# Altium PCB USB2.0_HUB.PcbDoc (part 1 of 2)
Units mm, origin at the board's own origin, x right, y up, seen from the top; angles counter-clockwise.
Board outline 91.95 x 55.97 mm, 4 copper layers (Top Layer, Layer 1, Layer 2, Bottom Layer), stack 1.544 mm thick; 125 components, 88 nets, 457 pads, 299 vias.
Unrouted connection lines stored in the file: 120.
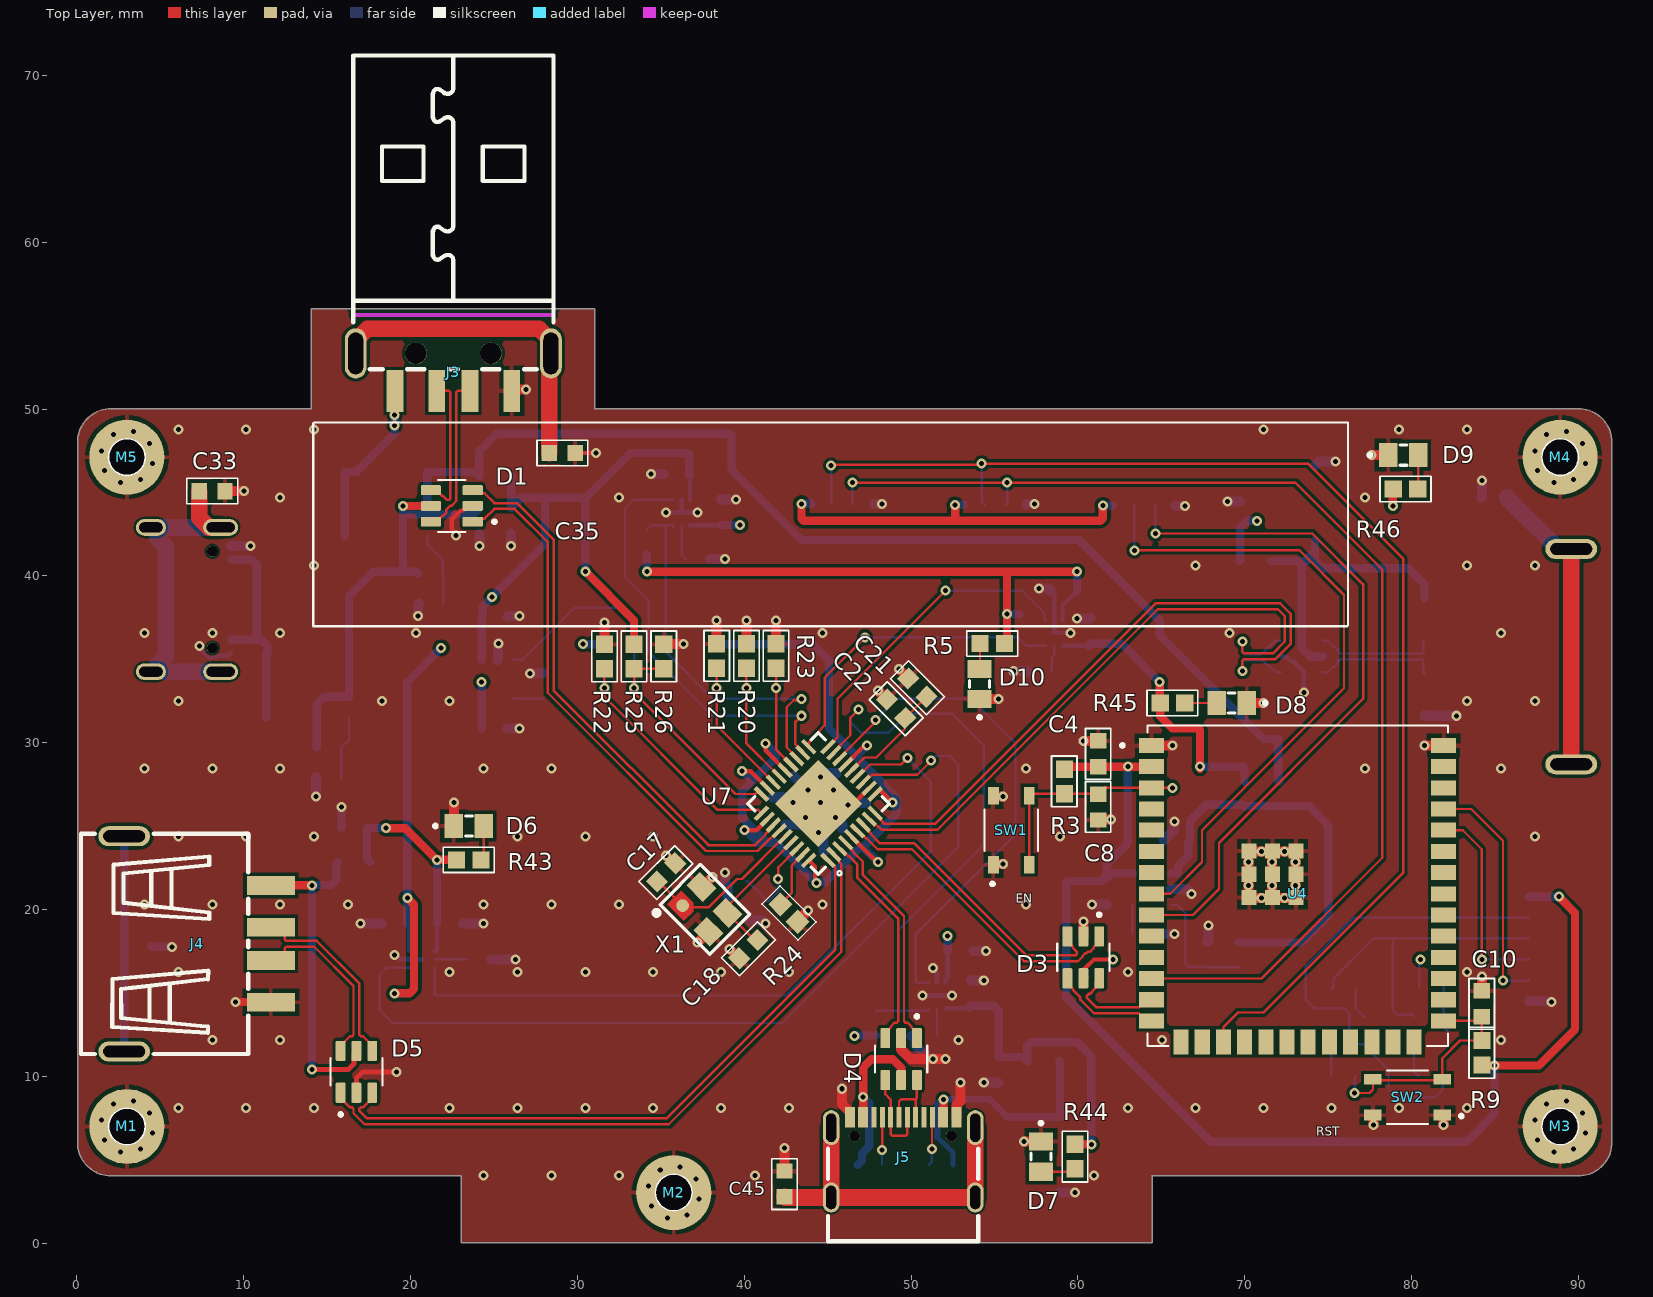
[diagram p0: Top Layer view]
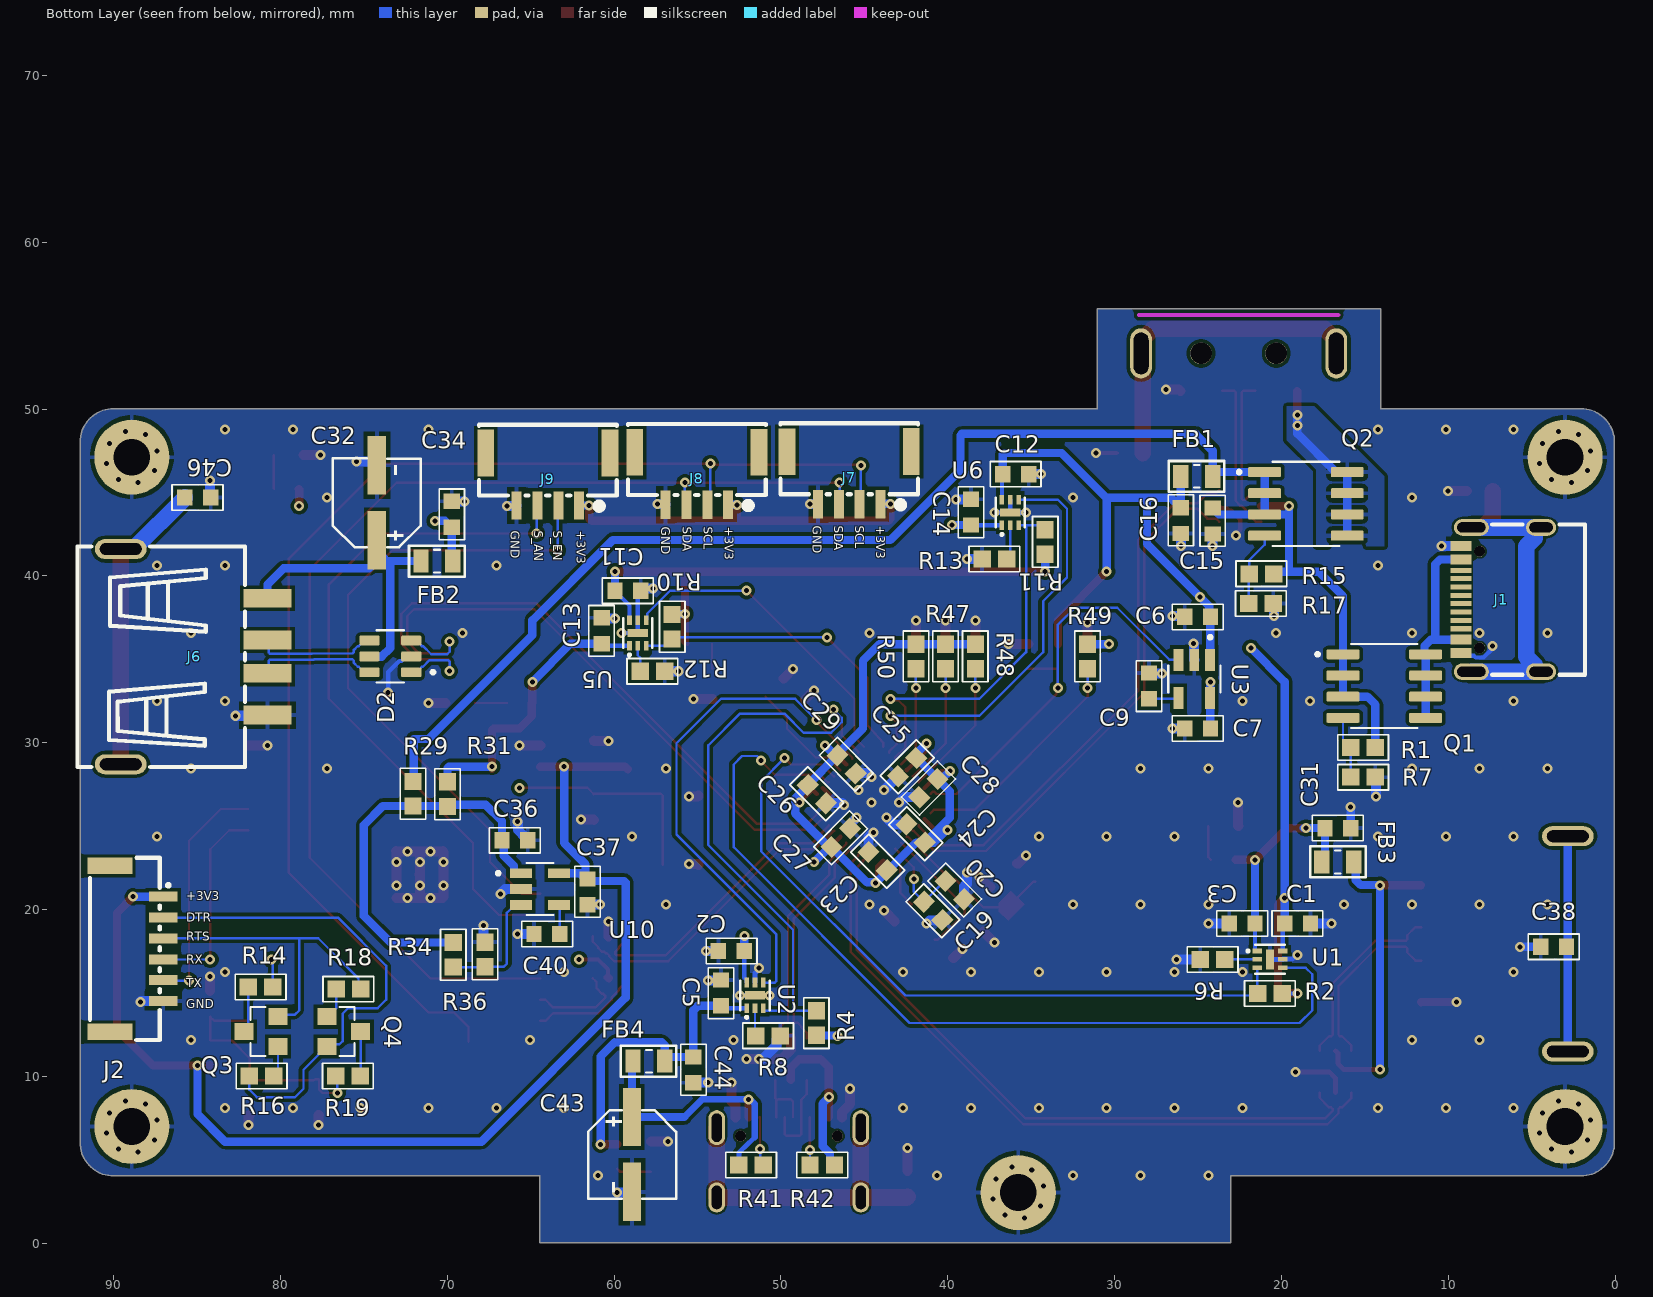
[diagram p1: Bottom Layer view, seen from below]
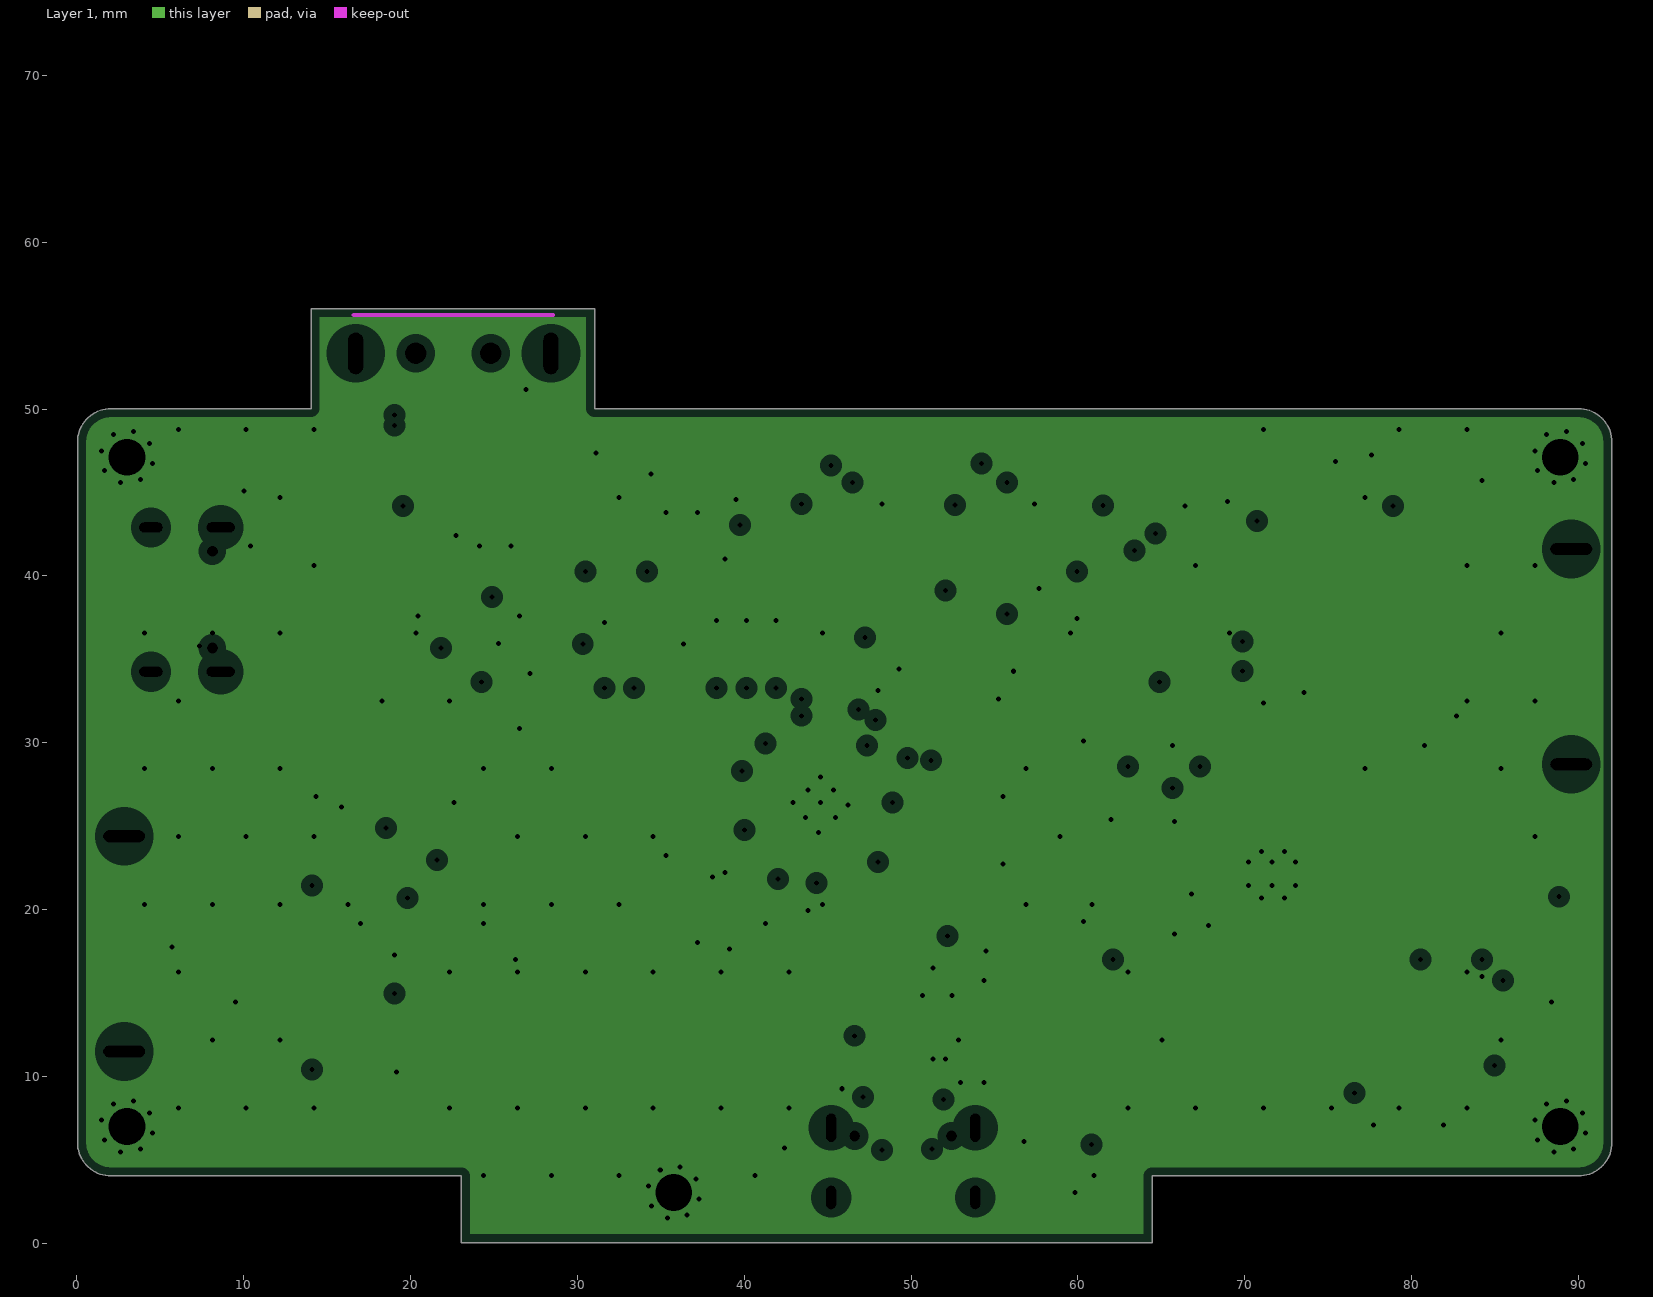
[diagram p2: Layer 1, clearances drawn from the general rule]
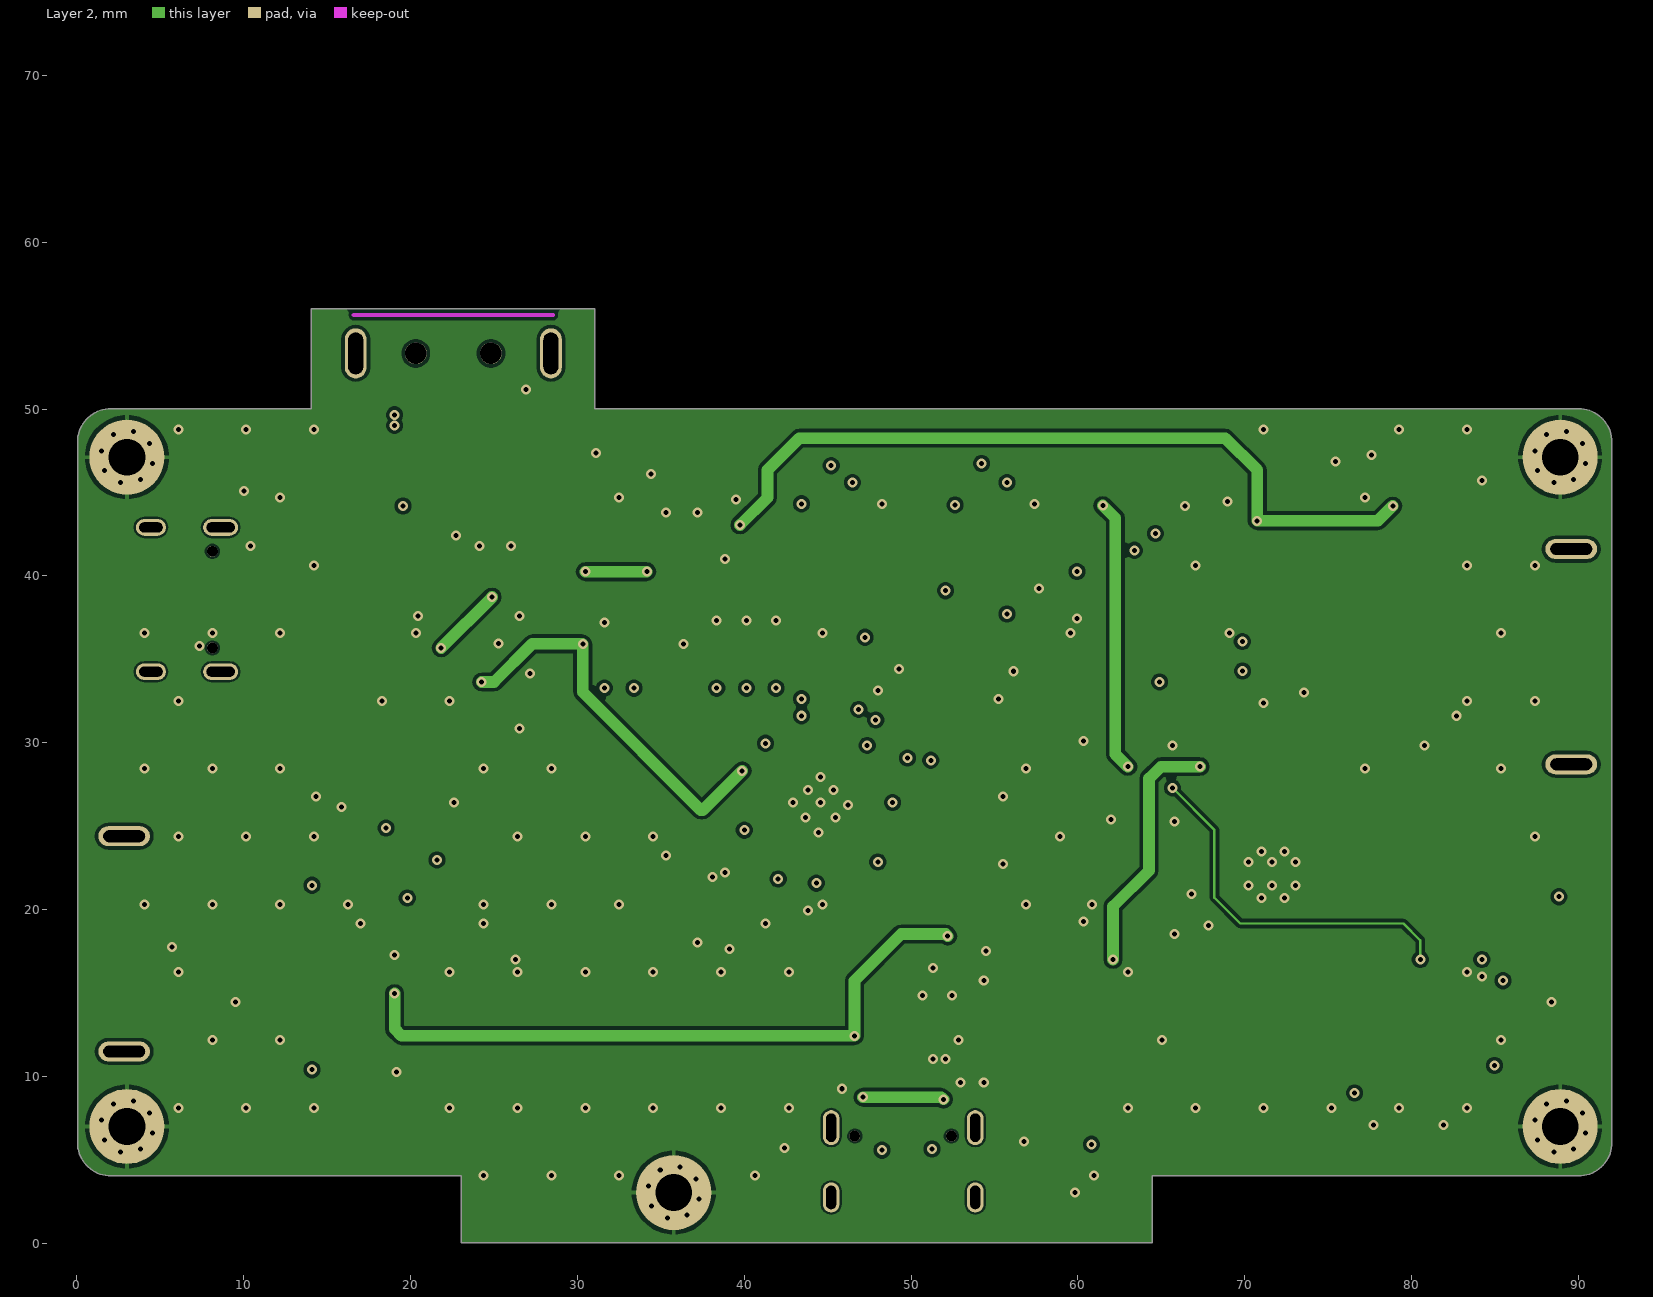
[diagram p3: Layer 2]
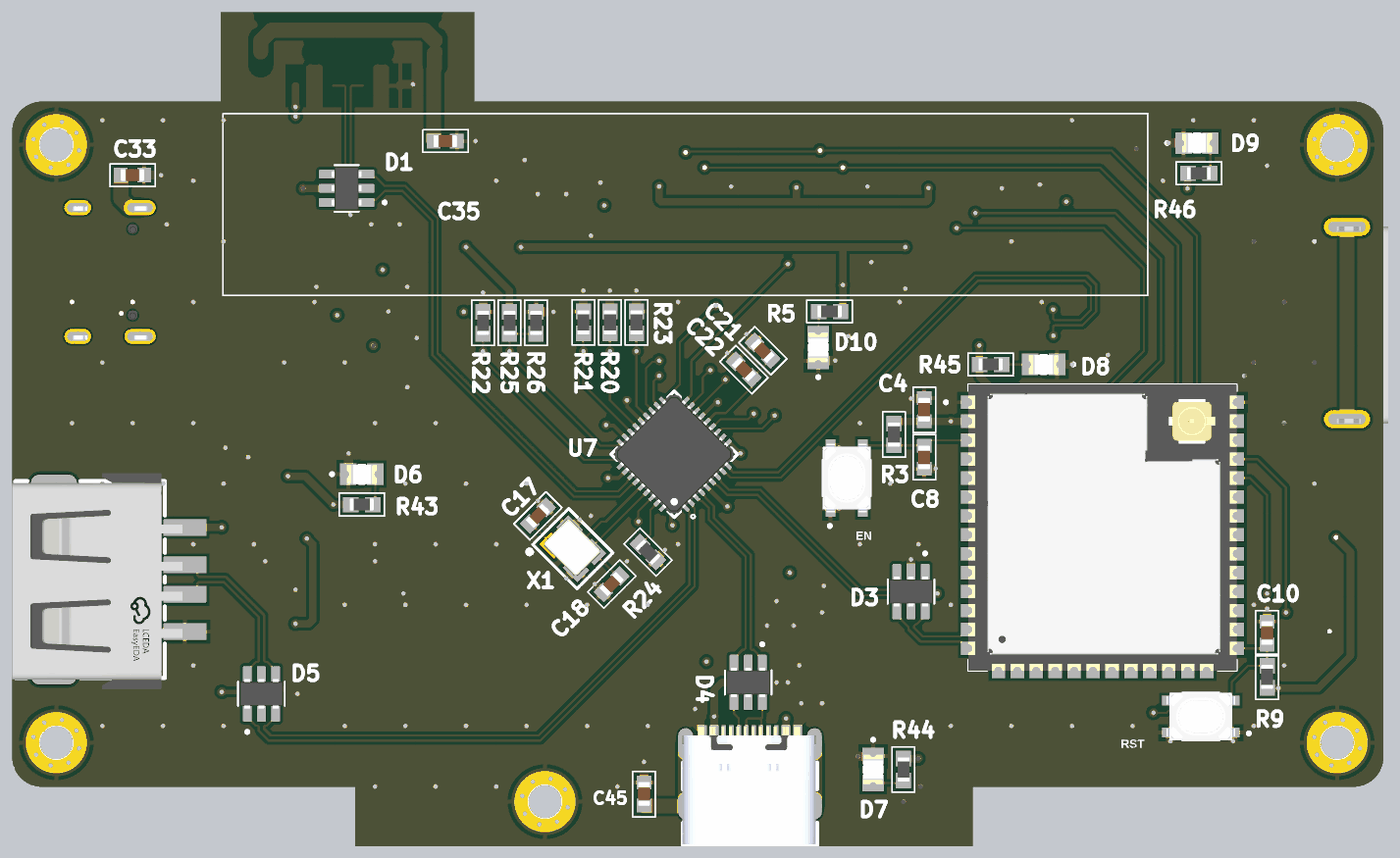
[diagram p5: 3D render of the assembled board from above, using the file's embedded part models]
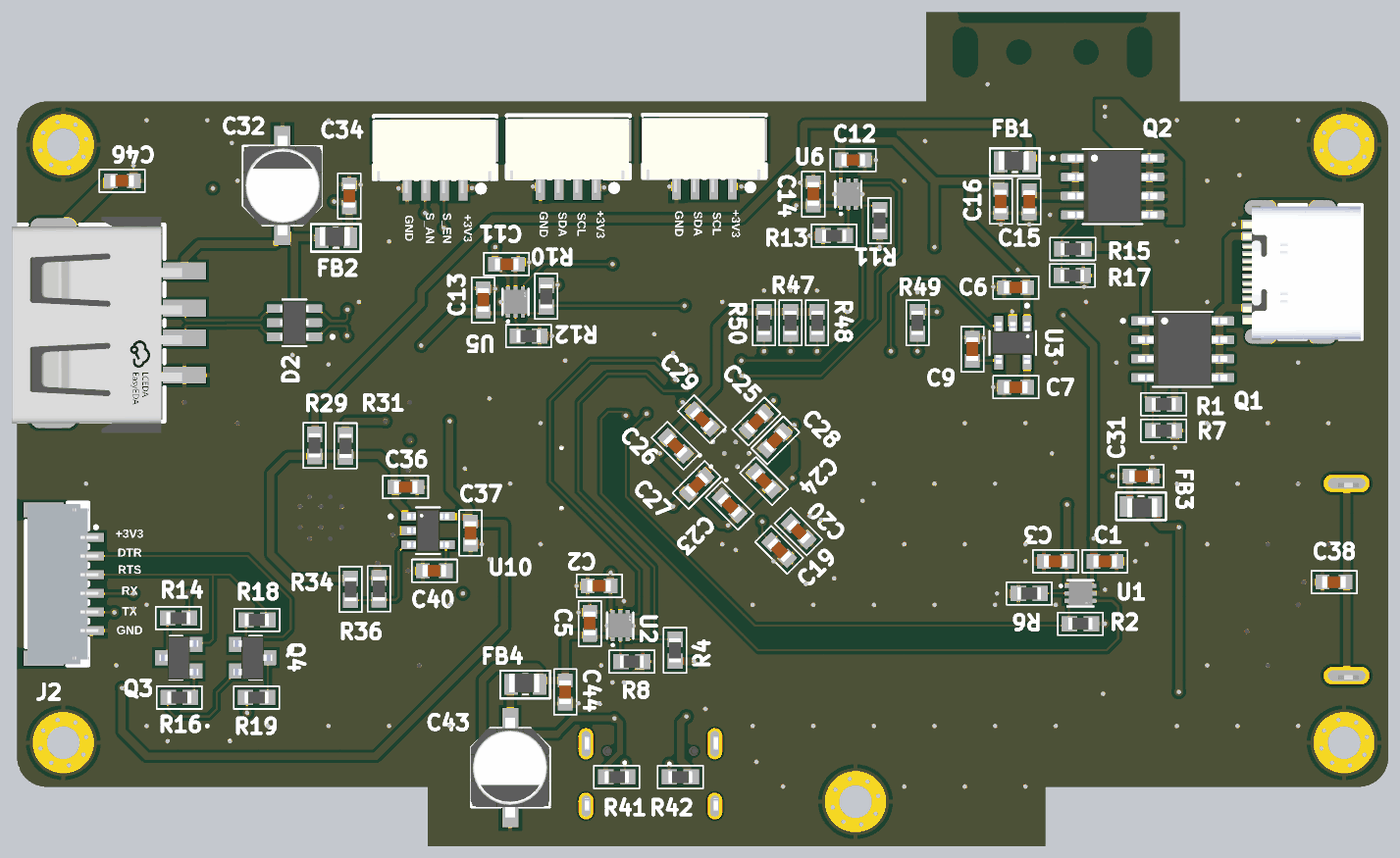
[diagram p6: 3D render of the assembled board from below, using the file's embedded part models]

## Layer stack, top to bottom
Top Solder: solder mask 0.0305, SM-001, Dk 3.8
Top Layer: signal copper 0.035
Dielectric 2: prepreg 0.092, PP-006, Dk 4.1
Layer 1: plane copper 0.03, net GND
Dielectric 1: core 1.23, FR-4, Dk 4.6
Layer 2: signal copper 0.03
Dielectric 3: prepreg 0.092, PP-006, Dk 4.1
Bottom Layer: signal copper 0.035
Board Layer Stack Bottom Solder: solder mask 0.0305, SM-001, Dk 3.8

## Board outline
2.05,4.05 cw(c2.05,6.05) 0.05,6.05 0.05,48.025 cw(c2.05,48.025) 2.05,50.025 14.051,50.025 14.051,56.025 31.038,56.025 31.038,50.025 90,50.025 cw(c90,48.025) 92,48.025 92,6.05 cw(c90,6.05) 90,4.05 64.448,4.05 64.448,0.05 23.05,0.05 23.05,4.05

## Design rules (kind name [scope] priority, off if disabled: settings)
Clearance Clearance_USB_C_Port [InComponent('J1') OR InComponent('J5')] p1: gap=0.12 ignorepadtopadclearanceinfootprint=FALSE
Clearance [All] p2: gap=0.2 ignorepadtopadclearanceinfootprint=FALSE
DiffPairsRouting DiffPairsRouting_90 [All] p1: maxlimit=0.203 minlimit=0.127 mostfreqgap=0.203 toplayer_mingap=0.203 toplayer_minwidth=0.147 toplayer_maxwidth=0.147 toplayer_prefwidth=0.147 bottomlayer_mingap=0.203 bottomlayer_minwidth=0.147 bottomlayer_maxwidth=0.147 bottomlayer_prefwidth=0.147 impedanceprofiledriven=TRUE impedanceprofileid={8A89C3E6-CE10-48AF-BB97-83B28F5E73FC} impedanceprofilevalue=90.000000 maxuncoupledlength=12.7
DiffPairsRouting [All] p2 off: maxlimit=0.254 minlimit=0.254 mostfreqgap=0.254 toplayer_minwidth=0.381 toplayer_maxwidth=0.381 toplayer_prefwidth=0.381 midlayer2_minwidth=0.381 midlayer2_maxwidth=0.381 midlayer2_prefwidth=0.381 bottomlayer_minwidth=0.381 bottomlayer_maxwidth=0.381 bottomlayer_prefwidth=0.381 maxuncoupledlength=12.7
MinimumSolderMaskSliver MinimumSolderMaskSliver_USB2514B [InComponent('U7')] p1: minsoldermaskwidth=0.06
MinimumSolderMaskSliver MinimumSolderMaskSliver_SPX3819M [InComponent('U10') OR InComponent('U9') OR InComponent('U3')] p2: minsoldermaskwidth=0.12
MinimumSolderMaskSliver MinimumSolderMaskSliver_MIC2099 [InComponent('U1') OR InComponent('U2') OR InComponent('U5') OR InComponent('U6')] p3: minsoldermaskwidth=0.08
MinimumSolderMaskSliver MinimumSolderMaskSliver_TypeC_ports [InComponent('J1') OR InComponent('J5')] p4: minsoldermaskwidth=0.08
MinimumSolderMaskSliver [All] p5: minsoldermaskwidth=0.254
PlaneClearance [All] p1: clearance=0.508
PlaneConnect [All] p1: pad.planeconnectstyle=Relief pad.reliefexpansion=0.508 pad.reliefentries=4 pad.reliefconductorwidth=0.508 pad.reliefairgap=0.254 via.planeconnectstyle=Direct via.reliefexpansion=0.508 via.reliefentries=4 via.reliefconductorwidth=0.254 via.reliefairgap=0.254
PolygonConnect [All] p1: connectstyle=Relief reliefconductorwidth=0.254 reliefentries=4 polygonreliefangle="90 Angle" airgapwidth=0.254
RoutingVias [All] p1: holewidth=0.3 width=0.6 viastyle="Through Hole" minholewidth=0.3 minwidth=0.6 maxholewidth=0.3 maxwidth=0.6
SilkToSilkClearance [All] p1: silktosilkclearance=0.2
SilkToSolderMaskClearance [IsText] p1: minsilkscreentomaskgap=0.254 clearancetoexposedcopper=TRUE
SolderMaskExpansion [All] p1: expansion=0.03 istentingtop=FALSE
SupplyNets "Schematic Supply Nets_11" [InNet('SH12_GND')] p1: voltage=0.000
SupplyNets "Schematic Supply Nets_13" [InNet('+5V FILT PORT1')] p2: voltage=0.000
SupplyNets "Schematic Supply Nets_18" [InNet('SH1_GND')] p3: voltage=0.000
SupplyNets "Schematic Supply Nets_17" [InNet('SH3_GND')] p4: voltage=0.000
SupplyNets "Schematic Supply Nets_16" [InNet('SH2_GND')] p5: voltage=0.000
SupplyNets "Schematic Supply Nets_15" [InNet('SH4_GND')] p6: voltage=0.000
SupplyNets "Schematic Supply Nets_7" [InNet('+5V HOST IN')] p7: voltage=0.000
SupplyNets "Schematic Supply Nets_14" [InNet('+5V VBUS_EXT')] p8: voltage=0.000
SupplyNets "Schematic Supply Nets_12" [InNet('+5V FILT PORT4')] p9: voltage=0.000
SupplyNets "Schematic Supply Nets_10" [InNet('+5V FILT PORT2')] p10: voltage=0.000
SupplyNets "Schematic Supply Nets_9" [InNet('+3V3')] p11: voltage=0.000
SupplyNets "Schematic Supply Nets_8" [InNet('+5V PORT3')] p12: voltage=0.000
SupplyNets "Schematic Supply Nets_6" [InNet('+5V HOST')] p13: voltage=0.000
SupplyNets "Schematic Supply Nets_5" [InNet('+5V PORT2')] p14: voltage=0.000
SupplyNets "Schematic Supply Nets_4" [InNet('+5V PORT1')] p15: voltage=0.000
SupplyNets "Schematic Supply Nets_3" [InNet('+5V HOST FILT')] p16: voltage=0.000
SupplyNets "Schematic Supply Nets_2" [InNet('+3V3 ESP1')] p17: voltage=0.000
SupplyNets "Schematic Supply Nets_1" [InNet('GND')] p18: voltage=0.000
SupplyNets "Schematic Supply Nets" [InNet('+5V PORT4')] p19: voltage=0.000
UnRoutedNet [All] p1: checkbadconnections=TRUE
Width Width_Connector_GND [InNet('SH1_GND') OR InNet('SH2_GND') OR InNet('SH3_GND') OR InNet('SH4_GND') OR InNet('SH12_GND')] p1: maxlimit=1 minlimit=0.254 preferedwidth=0.5
Width Width_Power [InNetClass('PWR') OR InNetClass('PWR_3V3')] p2: maxlimit=2 minlimit=0.254 preferedwidth=0.5
Width Width_GND [InNet('GND')] p3: maxlimit=1 minlimit=0.254 preferedwidth=0.6
Width [All] p4: maxlimit=0.143 minlimit=0.143 preferedwidth=0.254 toplayer_maxwidth=0.143 toplayer_prefwidth=0.143 bottomlayer_maxwidth=0.143 bottomlayer_prefwidth=0.143 impedanceprofiledriven=TRUE impedanceprofileid={D57F5E5A-0EFB-4EF6-B3E0-1C0422AFF5EA} impedanceprofilevalue=50.000000 minimp=50.000000 maximp=50.000000 favimp=50.000000
23 further rules are at their usual default settings.

## Classes and differential pairs
net class PWR_3V3: +3V3 "+3V3 ESP1"
net class PWR: "+5V FILT PORT1" "+5V FILT PORT2" "+5V FILT PORT4" "+5V HOST" "+5V HOST FILT" "+5V HOST IN" "+5V PORT1" "+5V PORT2" "+5V PORT3" "+5V PORT4" "+5V VBUS_EXT" VIN_ESP1
net class USB: USB_HOST_A_D_N USB_HOST_A_D_P USB_HOST_D_N USB_HOST_D_P USB_HUB1_D_N USB_HUB1_D_P USB_HUB2_D_N USB_HUB2_D_P USB_HUB3_D_N USB_HUB3_D_P USB_HUB4_D_N USB_HUB4_D_P USB_PORT1_D_N USB_PORT1_D_P USB_PORT2_D_N USB_PORT2_D_P USB_PORT3_D_N USB_PORT3_D_P USB_PORT4_D_N USB_PORT4_D_P
differential pair USB_PORT4_D: +USB_PORT4_D_P -USB_PORT4_D_N
differential pair USB_PORT3_D: +USB_PORT3_D_P -USB_PORT3_D_N
differential pair USB_PORT2_D: +USB_PORT2_D_P -USB_PORT2_D_N
differential pair USB_PORT1_D: +USB_PORT1_D_P -USB_PORT1_D_N
differential pair USB_HOST_D: +USB_HOST_D_P -USB_HOST_D_N
differential pair USB_HOST_A_D: +USB_HOST_A_D_P -USB_HOST_A_D_N
differential pair USB_HUB4_D: +USB_HUB4_D_P -USB_HUB4_D_N
differential pair USB_HUB3_D: +USB_HUB3_D_P -USB_HUB3_D_N
differential pair USB_HUB2_D: +USB_HUB2_D_P -USB_HUB2_D_N
differential pair USB_HUB1_D: +USB_HUB1_D_P -USB_HUB1_D_N

## Components (designator, comment, footprint, x,y, rotation, side; value= is the part's Value field where it differs from the comment)
C1 "2u2" CAP_0603 19.05,19.177 r0 bottom
C2 "2u2" CAP_0603 52.959,17.526 r180 bottom
C3 "2u2" CAP_0603 22.352,19.177 r180 bottom
C4 "100n" CAP_0603 61.214,29.337 r270 top
C5 "2u2" CAP_0603 53.594,14.997 r270 bottom
C6 "2u2" CAP_0603 25.019,37.547 r180 bottom
C7 "2u2" CAP_0603 25.019,30.861 r180 bottom
C8 "100n" CAP_0603 61.214,26.162 r90 top
C9 "100n" CAP_0603 27.94,33.401 r270 bottom
C10 "100n" CAP_0603 84.201,14.351 r270 top
C11 "2u2" CAP_0603 59.182,39.116 r0 bottom
C12 "2u2" CAP_0603 35.941,46.101 r0 bottom
C13 "2u2" CAP_0603 60.747,36.703 r270 bottom
C14 "2u2" CAP_0603 38.608,43.815 r270 bottom
C15 "2u2" CAP_0603 24.13,43.307 r90 bottom
C16 "2u2" CAP_0603 26.035,43.333 r90 bottom
C17 "10p" CAP_0603 35.306,22.225 r225 top
C18 "10p" CAP_0603 40.259,17.653 r45 top
C19 "10n" CAP_0603 40.894,19.939 r45 bottom
C20 "100n" CAP_0603 39.593,21.178 r45 bottom
C21 "10n" CAP_0603 50.388,33.305 r315 top
C22 "100n" CAP_0603 49.118,32.035 r315 top
C23 "2u2" CAP_0603 44.203,22.908 r225 bottom
C24 "100n" CAP_0603 41.917,24.559 r225 bottom
C25 "100n" CAP_0603 42.425,28.561 r135 bottom
C26 "100n" CAP_0603 47.855,26.941 r45 bottom
C27 "100n" CAP_0603 46.427,24.305 r315 bottom
C28 "100n" CAP_0603 41.155,27.291 r135 bottom
C29 "100n" CAP_0603 46.077,28.719 r45 bottom
C31 "2u2" CAP_0603 16.637,24.892 r0 bottom
C32 "100u" CAP_SMD 74.211,44.382 r90 bottom
C33 "4n7" CAP_0603 8.128,45.085 r0 top
C34 "2u2" CAP_0603 69.723,43.688 r270 bottom
C35 "4n7" CAP_0603 29.109,47.371 r0 top
C36 "2u2" CAP_0603 65.954,24.156 r0 bottom
C37 "2u2" CAP_0603 61.595,21.082 r90 bottom
C38 "4n7" CAP_0603 3.683,17.78 r180 bottom
C40 "100n" CAP_0603 64.008,18.542 r180 bottom
C43 "100u" CAP_SMD 58.928,5.334 r270 bottom locked
C44 "2u2" CAP_0603 55.245,10.414 r90 bottom
C45 "4n7" CAP_0603 42.418,3.556 r270 top
C46 "4n7" CAP_0603 84.963,44.704 r0 bottom
D1 "USBLC6-2SC6" USBLC6-2SC6_SOT-23-6L 22.479,44.323 r180 top
D2 "USBLC6-2SC6" USBLC6-2SC6_SOT-23-6L 73.406,35.306 r0 bottom
D3 "USBLC6-2SC6" USBLC6-2SC6_SOT-23-6L 60.198,17.145 r270 top
D4 "USBLC6-2SC6" USBLC6-2SC6_SOT-23-6L 49.276,11.049 r270 top
D5 "USBLC6-2SC6" USBLC6-2SC6_SOT-23-6L 16.891,10.287 r90 top
D6 "LED_GREEN" LED_0805 23.495,25.019 r0 top
D7 "LED_GREEN" LED_0805 57.785,5.207 r270 top
D8 "LED_GREEN" LED_0805 69.215,32.385 r180 top
D9 "LED_GREEN" LED_0805 79.502,47.244 r0 top
D10 "LED_RED" LED_0805 54.102,33.528 r90 top
FB1 "120Ω@100MHz" FB_0805 25.085,45.974 r0 bottom
FB2 "120Ω@100MHz" FB_0805 70.612,40.894 r0 bottom
FB3 "120Ω@100MHz" FB_0805 16.637,22.86 r180 bottom
FB4 "120Ω@100MHz" FB_0805 57.912,10.922 r0 bottom
J1 "USB 2.0 Type-C 16POS SMD R/A" GT-USB-7010B 4.358,38.421 r90 bottom
J2 "CONN 6P" JST_6P_GH_W/A 89.027,17.78 r270 bottom
J3 "USB 2.0 Type-A M R/A" "MALE USB 2.0 TYPE-A 4POS SMD R/A" 22.558,64.075 r180 top locked
J4 "USB 2.0 Type-A FM R/A" "Femalem USB 2.0 Type-A 4POS SMD R/A" 5.08,17.907 r270 top
J5 "USB 2.0 Type-C 16POS SMD R/A" GT-USB-7010B 49.362,2.667 r0 top locked
J6 "USB 2.0 Type-A FM R/A" "FEMALEM USB 2.0 TYPE-A 4POS SMD R/A" 87.326,35.116 r270 bottom locked
J7 "CONN 4P" JST_4P_GH_R/A 46.101,46.482 r0 bottom
J8 "CONN 4P" JST_4P_GH_R/A 55.23,46.439 r0 bottom
J9 "CONN 4P" JST_4P_GH_R/A 64.159,46.401 r0 bottom
M1 "MH" M2_MOUNTING_HOLE 3.01,7.01 r0 top locked
M2 "MH" M2_MOUNTING_HOLE 35.778,3.052 r0 top locked
M3 "MH" M2_MOUNTING_HOLE 88.9,7.01 r0 top locked
M4 "MH" M2_MOUNTING_HOLE 88.9,47.121 r0 top locked
M5 "MH" M2_MOUNTING_HOLE 3.01,47.121 r0 top locked
Q1 "AO4407A" AO4407A_SOIC-8 13.97,33.401 r180 bottom
Q2 "AO4407A" AO4407A_SOIC-8 18.669,44.323 r180 bottom locked
Q3 "S8050" S8050_SOT-23 81.155,12.7 r90 bottom
Q4 "S8050" S8050_SOT-23 76.198,12.7 r270 bottom
R1 "12k" RES_0603 15.113,29.718 r180 bottom
R2 "12k" RES_0603 20.701,14.986 r180 bottom
R3 "10k" RES_0603 59.182,27.686 r90 top
R4 "12k" RES_0603 47.879,13.208 r270 bottom
R5 "1k" RES_0603 54.864,35.941 r0 top
R6 "330R" RES_0603 24.13,17.018 r180 bottom
R7 "12k" RES_0603 15.113,27.94 r0 bottom
R8 "330R" RES_0603 50.773,12.446 r0 bottom
R9 "10k" RES_0603 84.201,11.43 r270 top
R10 "12k" RES_0603 56.515,36.957 r90 bottom
R11 "12k" RES_0603 34.163,42.037 r270 bottom
R12 "330R" RES_0603 57.699,34.29 r0 bottom
R13 "330R" RES_0603 37.211,41.021 r180 bottom
R14 "0" RES_0603 81.18,15.367 r180 bottom
R15 "12k" RES_0603 21.209,40.132 r180 bottom
R16 "10k" RES_0603 81.126,10.033 r0 bottom
R17 "12k" RES_0603 21.236,38.354 r0 bottom
R18 "10k" RES_0603 75.919,15.24 r180 bottom
R19 "0" RES_0603 75.946,10.033 r0 bottom
R20 "100k" RES_0603 40.132,35.206 r270 top
R21 "100k" RES_0603 38.354,35.206 r270 top
R22 "100k" RES_0603 31.623,35.179 r270 top
R23 "100k" RES_0603 41.91,35.206 r270 top
R24 "12k" RES_0603 42.684,19.8 r315 top
R25 "100k" RES_0603 33.401,35.179 r90 top
R26 "100k" RES_0603 35.179,35.179 r270 top
R29 "0" RES_0603 72.05,26.95 r90 bottom
R31 "0" RES_0603 69.977,26.924 r270 bottom
R34 "100k" RES_0603 69.637,17.298 r90 bottom
R36 "100k" RES_0603 67.732,17.325 r270 bottom
R41 "56k" RES_0603 51.789,4.699 r0 bottom
R42 "56k" RES_0603 47.525,4.699 r180 bottom
R43 "4k7" RES_0603 23.495,22.987 r180 top
R44 "4k7" RES_0603 59.817,5.207 r90 top
R45 "4k7" RES_0603 65.659,32.385 r180 top
R46 "4k7" RES_0603 79.629,45.212 r180 top
R47 "100k" RES_0603 40.132,35.179 r90 bottom
R48 "100k" RES_0603 38.354,35.179 r90 bottom
R49 "100k" RES_0603 31.623,35.179 r90 bottom
R50 "100k" RES_0603 41.91,35.179 r90 bottom
SW1 "PB" "ALPSALPINE SKRPABE010" 56.007,24.765 r90 top
SW2 "PB" "ALPSALPINE SKRPABE010" 79.756,8.763 r180 top
U1 "MIC2099-1YMT-TR" MIC2099_UDFN-6 20.684,16.962 r270 bottom
U2 "MIC2099-1YMT-TR" MIC2099_UDFN-6 51.49,14.876 r180 bottom
U3 "SPX3819M5-L-3-3/TR" SPX3819M5-L-3-3/TR_SOT-23-5 25.23,33.705 r270 bottom
U4 "SWITCH TACTILE SPST SMD" XCVR_ESP32-S3-WROOM-1U 73.165,21.435 r0 top locked
U5 "MIC2099-1YMT-TR" MIC2099_UDFN-6 58.516,36.593 r180 bottom
U6 "MIC2099-1YMT-TR" MIC2099_UDFN-6 36.195,43.815 r180 bottom
U7 "USB2514B-AEZC-TR" USB2514B_VQFN-36-EP(6x6) 43.547,27.258 r135 top locked
U10 "SPX3819M5-L-3-3/TR" SPX3819M5-L-3-3/TR_SOT-23-5 64.318,21.235 r180 bottom
X1 "24Mhz" SMD3225-4P 37.602,20.101 r135 top

## Footprints (in the part's own frame and the unit in brackets; to place one, negate y for a bottom-side part, rotate by r counter-clockwise, add the part's x,y. Pads: shape width x height; smd on the part's side, far side on the other; paste and mask are expansions set on the pad)
"ALPSALPINE SKRPABE010" [mm]
  rect 1.05x0.65 smd: 1(-2.075,1.075) 2(2.075,1.075) 3(-2.075,-1.075) 4(2.075,-1.075)
  silkscreen extent -3.32,-1.6 1.23,1.6, body extent -2.3,-1.6 2.3,1.6, height 2.5
AO4407A_SOIC-8 [mm]
  rrect25% 1.97x0.6 smd: 1(-2.348,1.905) 2(-2.348,0.635) 3(-2.348,-0.635) 4(-2.348,-1.905) 5(2.602,-1.905) 6(2.602,-0.635) 7(2.602,0.635) 8(2.602,1.905)
  silkscreen extent -3.97,-2.52 2.13,2.52, body extent -2.87,-2.45 3.13,2.45, height 1.75
CAP_0603 [mm]
  rect 0.92x0.98 smd: 1(-0.788,0) 2(0.762,0)
  silkscreen extent -1.52,-0.76 1.52,0.76, body extent -0.81,-0.41 0.79,0.41, height 0.9
CAP_SMD [mm]
  rect 3.5x1.1 smd paste+0 mask+0.051: 1(-2.245,0) 2(2.245,0)
  silkscreen extent -2.66,-2.62 2.66,2.65, body extent -3.34,-2.67 3.34,2.63, height 5.9
FB_0805 [mm]
  rect 0.92x1.38 smd: 1(-0.955,0) 2(0.955,0)
  silkscreen extent -1.65,-0.91 1.68,0.94, body extent -0.92,-0.71 1.08,0.54, height 0.6
"Femalem USB 2.0 Type-A 4POS SMD R/A" [mm] "Female"
  rect 1.12x2.88 smd paste-100 mask+0.051: 1(-3.547,6.554) 2(-1.047,6.554) 3(0.953,6.554) 4(3.453,6.554)
  oval 1.2x3.1 hole 0.7 slot 2.5 at 90 deg paste-2539.97 mask+0.051: 5(-6.497,-2.236) 6(6.403,-2.236)
  silkscreen extent -6.65,-4.83 6.56,5.21, body extent -7.18,-5.01 7.32,6.39, height 6.68
"FEMALEM USB 2.0 TYPE-A 4POS SMD R/A" [mm] "Female"
  rect 1.12x2.88 smd paste-100 mask+0.051: 1(-3.547,6.554) 2(-1.047,6.554) 3(0.953,6.554) 4(3.453,6.554)
  oval 1.2x3.1 hole 0.7 slot 2.5 at 90 deg paste-2539.97 mask+0.051: 5(-6.497,-2.236) 6(6.403,-2.236)
  silkscreen extent -6.65,-4.83 6.56,5.21, body extent -7.18,-5.01 7.32,6.39, height 6.68
GT-USB-7010B [mm]
  rect 0.6x1.24 smd paste-100 mask+0.05: A1_B12(-3.034,4.89) A4_B9(-2.234,4.89) B1_A12(3.366,4.89) B4_A9(2.566,4.89)
  rect 0.3x1.24 smd paste-100 mask+0.05: A5(-1.084,4.89) A6(-0.084,4.89) A7(0.416,4.89) A8(1.416,4.89) B5(1.916,4.89) B6(0.916,4.89) B7(-0.584,4.89) B8(-1.584,4.89)
  oval 1x2.1 hole 0.6 slot 1.7 at 90 deg paste-2539.97 mask+0.05: SH1(-4.154,4.27) SH2(4.486,4.27)
  oval 1x1.8 hole 0.6 slot 1.4 at 90 deg paste-2539.97 mask+0.05: SH3(-4.154,0.09) SH4(4.486,0.09)
  round 0.65 hole 0.65 unplated paste-2539.97: ""(-2.734,3.77) ""(3.056,3.77)
  silkscreen extent -4.33,-2.54 4.67,3.01, body extent -4.37,-2.47 4.57,5.43, height 3.31
JST_4P_GH_R/A [mm]
  rect 0.6x1.7 smd paste+0 mask+0.05: 1(-2.068,2.18) 2(-0.818,2.18) 3(0.432,2.18) 4(1.682,2.18)
  rect 1x2.8 smd paste+0 mask+0.05: 5(3.532,-0.97) 6(-3.918,-0.97)
  silkscreen extent -4.32,-2.67 3.93,2.42, body extent -4.25,-2.41 4,2.59, height 4.38
JST_6P_GH_W/A [mm]
  rect 0.6x1.7 smd paste+0 mask+0.051: 1(-2.998,2.01) 2(-1.748,2.01) 3(-0.498,2.01) 4(0.752,2.01) 5(2.002,2.01) 6(3.252,2.01)
  rect 1x2.7 smd paste+0 mask+0.051: 7(-4.848,-1.19) 8(5.102,-1.19)
  silkscreen extent -5.33,-2.38 5.59,2.41, body extent -5.25,-2.29 5.5,2.51, height 4.38
LED_0805 [mm]
  rect 1.1x1.45 smd: A(0.9,0) C(-0.9,0)
  silkscreen extent -2.1,-0.6 0.2,0.6, body extent -1,-0.65 1,0.65, height 0.9
M2_MOUNTING_HOLE [mm]
  round 4.5 hole 2.2 mask-0.2: 1(0,0)
"MALE USB 2.0 TYPE-A 4POS SMD R/A" [mm]
  rect 1x2.5 smd paste-100 mask+0.051: 1(3.488,12.985) 2(0.988,12.985) 3(-1.012,12.985) 4(-3.512,12.985)
  oval 1.3x3 hole 0.9 slot 2.5 at 90 deg paste-2539.97 mask+0.051: 5(-5.862,10.735) 5(5.838,10.735)
  round 1.3 hole 1.3 unplated paste-2539.97: ""(-2.262,10.735) ""(2.238,10.735)
  Keep-Out Layer lines w0.254: 5.957,8.435 -5.981,8.435
  silkscreen extent -6.01,-7.11 5.99,11.69, body extent -6.22,-6.96 6.3,13.84, height 3.38
MIC2099_UDFN-6 [mm]
  rect 0.28x0.585 smd paste+0 mask+0.051: 1(-0.564,-0.779) 2(-0.064,-0.779) 3(0.436,-0.779) 4(0.436,0.756) 5(-0.064,0.756) 6(-0.564,0.756)
  rect 1.2x0.5 smd paste+0 mask+0.051: 7(-0.064,-0.012)
  silkscreen extent -0.94,-1.4 0.81,0.86, body extent -0.86,-0.8 0.74,0.8, height 0.58
RES_0603 [mm]
  rect 1.04x1.02 smd: 1(-0.735,0) 2(0.735,0)
  silkscreen extent -1.52,-0.76 1.52,0.76, body extent -0.8,-0.4 0.8,0.4, height 0.55
S8050_SOT-23 [mil]
  rect 40x45 smd: 1(-35,-40) 2(35,-40) 3(0,40)
  silkscreen extent -58,-10 58,25, body extent -57,-51 57,51, height 55
SMD3225-4P [mm] "HCI XC32M4-8.000-F12LJDT"
  round 0.762 smd: 1(1.016,0.813)
  rect 1.4x1.15 smd paste+0 mask+0.051: 2(-1.185,0.824) 3(-1.185,-0.776) 4(1.016,-0.776)
  Top Layer region: 1.716,0.249 0.678,0.249 0.316,0.628 0.316,1.399 1.716,1.399
  silkscreen extent -2.18,-1.68 2.02,2.37, body extent -1.6,-1.25 1.6,1.25, height 0.6
SPX3819M5-L-3-3/TR_SOT-23-5 [mm]
  rect 1.32x0.59 smd paste+0 mask+0.102: 1(-1.272,0.95) 2(-1.272,0) 3(-1.272,-0.95) 4(1.018,-0.95) 5(1.018,0.95)
  silkscreen extent -2.73,-1.56 0.67,1.56, body extent -1.53,-1.45 1.27,1.45, height 1.45
USB2514B_VQFN-36-EP(6x6) [mm]
  rect 1.08x0.26 smd: 1(-4.085,2) 2(-4.085,1.5) 3(-4.085,1) 4(-4.085,0.5) 5(-4.085,0) 6(-4.085,-0.5) 7(-4.085,-1) 8(-4.085,-1.5) 9(-4.085,-2) 19(1.545,-2) 20(1.545,-1.5) 21(1.545,-1) 22(1.545,-0.5) 23(1.545,0) 24(1.545,0.5) 25(1.545,1) 26(1.545,1.5) 27(1.545,2)
  rect 0.26x1.08 smd: 10(-3.27,-2.815) 11(-2.77,-2.815) 12(-2.27,-2.815) 13(-1.77,-2.815) 14(-1.27,-2.815) 15(-0.77,-2.815) 16(-0.27,-2.815) 17(0.23,-2.815) 18(0.73,-2.815) 28(0.73,2.815) 29(0.23,2.815) 30(-0.27,2.815) 31(-0.77,2.815) 32(-1.27,2.815) 33(-1.77,2.815) 34(-2.27,2.815) 35(-2.77,2.815) 36(-3.27,2.815)
  rect 3.7x3.7 smd paste-0.679: 37(-1.27,0)
  silkscreen extent -5.24,-3 1.73,3, body extent -4.27,-3 1.73,3, height 1
USBLC6-2SC6_SOT-23-6L [mm]
  rrect25% 1.21x0.59 smd: 1(-1.255,1.077) 2(-1.255,0.127) 3(-1.255,-0.823) 4(1.255,-0.823) 5(1.255,0.127) 6(1.255,1.077)
  silkscreen extent -2.66,-1.44 0.81,1.69, body extent -1.4,-1.34 1.4,1.59, height 0.4
XCVR_ESP32-S3-WROOM-1U [mm]
  rect 1.5x0.9 smd: 1(-8.75,8.41) 2(-8.75,7.14) 3(-8.75,5.87) 4(-8.75,4.6) 5(-8.75,3.33) 6(-8.75,2.06) 7(-8.75,0.79) 8(-8.75,-0.48) 9(-8.75,-1.75) 10(-8.75,-3.02) 11(-8.75,-4.29) 12(-8.75,-5.56) 13(-8.75,-6.83) 14(-8.75,-8.1) 27(8.75,-8.1) 28(8.75,-6.83) 29(8.75,-5.56) 30(8.75,-4.29) 31(8.75,-3.02) 32(8.75,-1.75) 33(8.75,-0.48) 34(8.75,0.79) 35(8.75,2.06) 36(8.75,3.33) 37(8.75,4.6) 38(8.75,5.87) 39(8.75,7.14) 40(8.75,8.41)
  rect 0.9x1.5 smd: 15(-6.985,-9.35) 16(-5.715,-9.35) 17(-4.445,-9.35) 18(-3.175,-9.35) 19(-1.905,-9.35) 20(-0.635,-9.35) 21(0.635,-9.35) 22(1.905,-9.35) 23(3.175,-9.35) 24(4.445,-9.35) 25(5.715,-9.35) 26(6.985,-9.35)
  rect 0.9x0.9 smd: 41_1(-2.9,2.09) 41_2(-1.5,2.09) 41_3(-0.1,2.09) 41_4(-2.9,0.69) 41_5(-1.5,0.69) 41_6(-0.1,0.69) 41_7(-2.9,-0.71) 41_8(-1.5,-0.71) 41_9(-0.1,-0.71)
  silkscreen extent -10.6,-9.6 9,9.6, body extent -9,-9.6 9,9.6, height 3.35

## Part data
C1 C2 C3 C5 C11 C12 C13 C14 C15 C16 C23 C31 C34 C44: library part "YAGEO CC0603KRX7R9BB104_1", "CAP CER 2.2uF 16V X7R 0603", LCSC Part Number=C914769, Manufacturer=YAGEO, Manufacturer Part Number=CC0603KRX7R7BB225, Package=0603, ComponentLink2Description="Digikey Link", ComponentLink3Description="LCSC Link", ComponentLink3URL=https://www.lcsc.com/product-detail/C914769.html?spm=wm.fly.bg.0.xh___wm.sxq.dhl.mly.12-0-4&lcsc_vid=QlAIX1RQQQJfX1VRTwcNAQJXTlRaUQBVEQBYAwJfFFcxVlNRQ1VcX1FSRFRbUDsOAxUeFF5JWBYZEEoKFBINSQcJGk4dAgUUFAk%3D, Mounting Type=SMD
C4 C8 C9 C10 C20 C22 C24 C25 C26 C27 C28 C29 C40: library part "YAGEO CC0603KRX7R9BB104", "100nF ±10% 50V Ceramic Capacitor X7R 0603", LCSC Part Number=C14663, Manufacturer=YAGEO, Manufacturer Part Number=CC0603KRX7R9BB104, Package=0603, ComponentLink2Description="Digikey Link", ComponentLink3Description="LCSC Link", ComponentLink3URL=https://www.lcsc.com/product-detail/C14663.html?spm=wm.fly.bg.0.xh___wm.sxq.dhl.mly.12-0-4&lcsc_vid=QlAIX1RQQQJfX1VRTwcNAQJXTlRaUQBVEQBYAwJfFFcxVlNRQ1VcX1FSRFRbUDsOAxUeFF5JWBYZEEoKFBINSQcJGk4dAgUUFAk%3D, Mounting Type=SMD
C6 C7 C36 C37: library part "YAGEO CC0603KRX7R7BB225", "2.2uF ±10% 16V Ceramic Capacitor X7R 0603", LCSC Part Number=C914769, Manufacturer=YAGEO, Manufacturer Part Number=CC0603KRX7R7BB225, Package=0603, ComponentLink2Description="Digikey Link", ComponentLink3Description="LCSC Link", ComponentLink3URL=https://www.lcsc.com/product-detail/C914769.html?spm=wm.fly.bg.0.xh___wm.sxq.dhl.mly.12-0-4&lcsc_vid=QlAIX1RQQQJfX1VRTwcNAQJXTlRaUQBVEQBYAwJfFFcxVlNRQ1VcX1FSRFRbUDsOAxUeFF5JWBYZEEoKFBINSQcJGk4dAgUUFAk%3D, Mounting Type=SMD
C17 C18: library part "YAGEO CC0603FRNPO9BN100", "10pF ±1% 50V Ceramic Capacitor NP0 0603", LCSC Part Number=C309467, Manufacturer=YAGEO, Manufacturer Part Number=CC0603FRNPO9BN100, Package=0603, ComponentLink2Description="Digikey Link", ComponentLink3Description="LCSC Link", ComponentLink3URL=https://www.lcsc.com/product-detail/C309467.html?spm=wm.fly.bg.0.xh___wm.fly.dhl.mly.12-0-4&lcsc_vid=QlAIX1RQQQJfX1VRTwcNAQJXTlRaUQBVEQBYAwJfFFcxVlNRQ1ReUVNTQlhZUDtW, Mounting Type=SMD
C19 C21: library part "YAGEO CC0603KRX7R9BB103", "10nF ±10% 50V Ceramic Capacitor X7R 0603", LCSC Part Number=C100042, Manufacturer=YAGEO, Manufacturer Part Number=CC0603KRX7R9BB103, Package=0603, ComponentLink2Description="Digikey Link", ComponentLink3Description="LCSC Link", ComponentLink3URL=https://www.lcsc.com/product-detail/C100042.html?spm=wm.fly.bg.0.xh___wm.sxq.dhl.mly.12-0-4&lcsc_vid=QlAIX1RQQQJfX1VRTwcNAQJXTlRaUQBVEQBYAwJfFFcxVlNRQ1ReUVNTQlhZUDtW, Mounting Type=SMD
C32 C43: library part "CAP ALUM 100uF", "100uF ±20% 16V Aluminum Electrolytic Capacitors 2000hrs@105℃", LCSC Part Number=C336792, Manufacturer=PANASONIC, Manufacturer Part Number=EEEFT1C101AR, Package=SMD, ComponentLink2Description="Digikey Link", ComponentLink3Description="LCSC Link", ComponentLink3URL=https://www.lcsc.com/product-detail/C336792.html, Mounting Type=SMD
C33 C35 C38 C45 C46: library part "YAGEO CC0603JRX7R9BB472", "4.7nF ±5% 50V Ceramic Capacitor X7R 0603", LCSC Part Number=C115060, Manufacturer=YAGEO, Manufacturer Part Number=CC0603JRX7R9BB472, Package=0603, ComponentLink2Description="Digikey Link", ComponentLink3Description="LCSC Link", Mounting Type=SMD
D1 D2 D3 D4 D5: library part "ST USBLC6-2SC6", "17VC Clamp 5A Ipp ESD DIODE SOT-23-6L", LCSC Part Number=C7519, Manufacturer=ST, Package=SOT-23-6L, ComponentLink1Description="Digikey Link", ComponentLink2Description="LCSC Link", ComponentLink2URL=https://www.lcsc.com/product-detail/C7519.html?s_z=n_usblc6-2sc6&spm=wm.ssy.bg.0.xh&lcsc_vid=QlAIX1RQQQJfX1VRTwcNAQJXTlRaUQBVEQBYAwJfFFcxVlNRQ1VbUVRUTldbUTsOAxUeFF5JWBYZEEoKFBINSQcJGk4%3D, Manufacturer Part Number=USBLC6-2SC6, Mounting Type=SMD
D6 D7 D8 D9: "Green 535nm LED Indication - Discrete 2.6V~3.2V 0805", LCSC Part Number=C7280944, Manufacturer=TONYU, Manufacturer Part Number=DY-S2012508UGC-T5-3T-03, Package=0805, ComponentLink1Description="Digikey Link", ComponentLink2Description="LCSC Link", ComponentLink2URL=https://www.lcsc.com/product-detail/C7280944.html?spm=wm.fly.bg.2.xh&lcsc_vid=ElNWVwADR1BcUgADEwJfBlBQQ1hZBQcDEVVXV1VQE1kxVlNRQlFYU1JXRlJZVTsOAxUeFF5JWBYZEEoKFBINSQcJGk4%3D, Mounting Type=SMD
D10: "LED RED WATER CLEAR 0805 SMD", LCSC Part Number=C51933307, Manufacturer="Guiguang light", Manufacturer Part Number=GL0805UR01, Package=0805, ComponentLink1Description="Digikey Link", ComponentLink2Description="LCSC Link", ComponentLink2URL=https://www.lcsc.com/product-detail/C51933307.html, Mounting Type=SMD
FB1 FB2 FB3 FB4: library part "muRata BLM21PG121SN1D", "FERRITE BEAD 120Ω 0805 1LN", LCSC Part Number=C79382, Manufacturer=muRata, Manufacturer Part Number=BLM21PG121SN1D, Package=0805, ComponentLink2Description="Digikey Link", ComponentLink3Description="LCSC Link", ComponentLink3URL=https://www.lcsc.com/product-detail/C79382.html, Mounting Type=SMD
J1 J5: library part GT-USB-7010B, "USB-C (USB TYPE-C) Receptacle Connector 16 Position Surface Mount, Right Angle", LCSC Part Number=C2988369, Manufacturer=G-Switch, Manufacturer Part Number=GT-USB-7010ASV, Package=SMD, ComponentLink1Description="Digikey Link", ComponentLink2Description="LCSC Link", ComponentLink2URL=https://www.lcsc.com/product-detail/C2988369.html?s_z=n_C2988369, Mounting Type=SMD
J2: library part JST_6P_GH_R/A, "Connector Header 6 position 1.25mm Pitch 1A Surface Mount, Right Angle -25℃~+85℃", LCSC Part Number=C3008556, Manufacturer="SHOU HAN", Manufacturer Part Number=1.25-6PWTDK, Package="SMD,P=1.25mm,Surface Mount,Right Angle", ComponentLink1Description="Digikey Link", ComponentLink2Description="LCSC Link", ComponentLink2URL=https://www.lcsc.com/product-detail/C3008556.html?spm=wm.fly.bg.0.xh&lcsc_vid=QlAIX1RQQQJfX1VRTwcNAQJXTlRaUQBVEQBYAwJfFFcxVlNRQ1deVldfQ1JYVTtW, Mounting Type=SMD
J3: "USB-A (USB TYPE-A) Receptacle Connector 4 Position Surface Mount, Right Angle", LCSC Part Number=C720521, Manufacturer=XUNPU, Manufacturer Part Number=USB-212-BCW, Package=SMD, ComponentLink1Description="Digikey Link", ComponentLink2Description="LCSC Link", ComponentLink2URL=https://www.lcsc.com/product-detail/C720521.html?spm=wm.fly.bg.0.xh&lcsc_vid=QlAIX1RQQQJfX1VRTwcNAQJXTlRaUQBVEQBYAwJfFFcxVlNRQ1hdVF1eQ1lbUztW, Mounting Type=SMD
J4 J6: "USB-A (USB TYPE-A) Receptacle Connector 4 Position Surface Mount, Right Angle", LCSC Part Number=C668591, Manufacturer="SHOU HAN", Manufacturer Part Number="10.0 QHHTZB6.3", Package=SMD, ComponentLink1Description="Digikey Link", ComponentLink2Description="LCSC Link", ComponentLink2URL=https://www.lcsc.com/product-detail/C668591.html, Mounting Type=SMD
J7 J8 J9: library part JST_4P_GH_R/A, "Connector Header 4 position 1.25mm Pitch 1A Surface Mount, Right Angle -25℃~+85℃", LCSC Part Number=C3029379, Manufacturer=XUNPU, Manufacturer Part Number=WAFER-GH1.25-4PWB, Package="SMD,P=1.25mm,Surface Mount,Right Angle", ComponentLink1Description="Digikey Link", ComponentLink2Description="LCSC Link", ComponentLink2URL=https://www.lcsc.com/product-detail/C3029379.html?spm=wm.fly.bg.0.xh&lcsc_vid=QlAIX1RQQQJfX1VRTwcNAQJXTlRaUQBVEQBYAwJfFFcxVlNRQ1deVldfQ1JYVTtW, Mounting Type=SMD
M1 M2 M3 M4 M5: library part M2_Mounting_hole
Q1 Q2: library part "AOS AO4407A", "P-Channel 30V 12A 3.1W Surface Mount SOIC-8", LCSC Part Number=C16072, Manufacturer=AOS, Package=SOIC-8, ComponentLink1Description="Digikey Link", ComponentLink2Description="LCSC Link", ComponentLink2URL=https://www.lcsc.com/product-detail/C16072.html?s_z=n_AO4407A, Manufacturer Part Number=AO4407A, Mounting Type=SMD
Q3 Q4: library part "JSMSEMI S8050", "Bipolar (BJT) Transistor 25V 500mA 150MHz 300mW Surface Mount SOT-23", LCSC Part Number=C916390, Manufacturer=JSMSEMI, Package=SOT-23, ComponentLink1Description="Digikey Link", ComponentLink2Description="LCSC Link", ComponentLink2URL=https://www.lcsc.com/product-detail/C916390.html?s_z=n_S8050&spm=wm.ssy.bg.1.xh&lcsc_vid=QlAIX1RQQQJfX1VRTwcNAQJXTlRaUQBVEQBYAwJfFFcxVlNRQ1RXUVNXR1NXVTsOAxUeFF5JWBYZEEoKFBINSQcJGk4dAgUUFAk%3D, Manufacturer Part Number=S8050, Mounting Type=SMD
R1 R2 R4 R7 R10 R11 R15 R17 R24: library part "YAGEO RC0603FR-0712KL", "RES 12kΩ ±1% 100mW 0603", LCSC Part Number=C114659, Manufacturer=YAGEO, Manufacturer Part Number=RC0603FR-0712KL, Package=0603, ComponentLink1Description="Digikey Link", ComponentLink2Description="LCSC Link", Mounting Type=SMD
R3 R9 R16 R18: library part "YAGEO RC0603FR-0710KL", "100mW 10kΩ 75V Thick Film Resistor ±100ppm/℃ ±1% 0603 Chip Resistor - Surface Mount RoHS", LCSC Part Number=C98220, Manufacturer=YAGEO, Manufacturer Part Number=RC0603FR-0710KL, Package=0603, ComponentLink1Description="Digikey Link", ComponentLink2Description="LCSC Link", ComponentLink2URL=https://www.lcsc.com/product-detail/C98220.html?spm=wm.fly.bg.0.xh___wm.ssy.dhl.mly.12-6-1&lcsc_vid=QlAIX1RQQQJfX1VRTwcNAQJXTlRaUQBVEQBYAwJfFFcxVlNRQ1RXVV1VT1FcVTsOAxUeFF5JWBYZEEoKFBINSQcJGk4%3D, Mounting Type=SMD
R5: library part "YAGEO RC0603JR-071KL", "100mW 1kΩ 75V Thick Film Resistor ±100ppm/℃ ±5% 0603 Chip Resistor - Surface Mount RoHS", LCSC Part Number=C14676, Manufacturer=YAGEO, Manufacturer Part Number=RC0603JR-071KL, Package=0603, ComponentLink1Description="Digikey Link", ComponentLink2Description="LCSC Link", ComponentLink2URL=https://www.lcsc.com/product-detail/C14676.html, Mounting Type=SMD
R6 R8 R12 R13: library part "YAGEO RC0603JR-07330RL", "RES 330Ω ±5% 100mW 0603", LCSC Part Number=C105879, Manufacturer=YAGEO, Manufacturer Part Number=RC0603JR-07330RL, Package=0603, ComponentLink1Description="Digikey Link", ComponentLink2Description="LCSC Link", ComponentLink2URL=https://www.lcsc.com/product-detail/C105879.html?spm=wm.fly.bg.0.xh___wm.ssy.dhl.mly.12-6-1&lcsc_vid=QlAIX1RQQQJfX1VRTwcNAQJXTlRaUQBVEQBYAwJfFFcxVlNRQ1VWVFNXTlZeXzsOAxUeFF5JWBYZEEoKFBINSQcJGk4dAgUUFAk%3D, Mounting Type=SMD
R14 R19 R29 R31: library part "YAGEO RC0603JR-070RL", "100mW 0Ω 75V Thick Film Resistor ±5% 0603 Chip Resistor - Surface Mount RoHS", LCSC Part Number=C95177, Manufacturer=YAGEO, Manufacturer Part Number=RC0603JR-070RL, Package=0603, ComponentLink1Description="Digikey Link", ComponentLink2Description="LCSC Link", Mounting Type=SMD
  R14 R19: ComponentLink2URL=https://www.lcsc.com/product-detail/C98220.html?spm=wm.fly.bg.0.xh___wm.ssy.dhl.mly.12-6-1&lcsc_vid=QlAIX1RQQQJfX1VRTwcNAQJXTlRaUQBVEQBYAwJfFFcxVlNRQ1RXVV1VT1FcVTsOAxUeFF5JWBYZEEoKFBINSQcJGk4%3D
  R29 R31: ComponentLink2URL=https://www.lcsc.com/product-detail/C95177.html?spm=wm.fly.bg.0.xh___wm.ssy.dhl.mly.12-6-1&lcsc_vid=QlAIX1RQQQJfX1VRTwcNAQJXTlRaUQBVEQBYAwJfFFcxVlNRQ1RXVV1VT1FcVTsOAxUeFF5JWBYZEEoKFBINSQcJGk4%3D
R20 R21 R22 R23 R25 R26 R34 R36 R47 R48 R49 R50: library part "YAGEO RC0603JR-07100KL", "RES 100kΩ ±5% 100mW 0603", LCSC Part Number=C100048, Manufacturer=YAGEO, Manufacturer Part Number=RC0603JR-07100KL, Package=0603, ComponentLink1Description="Digikey Link", ComponentLink2Description="LCSC Link", ComponentLink2URL=https://www.lcsc.com/product-detail/C100048.html?spm=wm.fly.bg.1.xh___wm.ssy.dhl.mly.12-6-1&lcsc_vid=QlAIX1RQQQJfX1VRTwcNAQJXTlRaUQBVEQBYAwJfFFcxVlNRQ1VcX1FSRFRbUDsOAxUeFF5JWBYZEEoKFBINSQcJGk4dAgUUFAk%3D, Mounting Type=SMD
R41 R42: library part "YAGEO RC0603FR-0756KL", "100mW 56kΩ 75V Thick Film Resistor ±100ppm/℃ ±1% 0603 Chip Resistor - Surface Mount RoHS", LCSC Part Number=C114630, Manufacturer=YAGEO, Manufacturer Part Number=RC0603FR-0756KL, Package=0603, ComponentLink1Description="Digikey Link", ComponentLink2Description="LCSC Link", ComponentLink2URL=https://www.lcsc.com/product-detail/C114630.html?spm=wm.fly.bg.0.xh___wm.sxq.dhl.mly.12-6-1&lcsc_vid=ElNWVwADR1BcUgADEwJfBlBQQ1hZBQcDEVVXV1VQE1kxVlNRQlFeU1BSRFhbUztW, Mounting Type=SMD
R43 R44 R45 R46: library part "YAGEO RC0603JR-074K7L", "100mW 4.7kΩ 75V Thick Film Resistor ±100ppm/℃ ±5% 0603 Chip Resistor - Surface Mount RoHS", LCSC Part Number=C105428, Manufacturer=YAGEO, Manufacturer Part Number=RC0603JR-074K7L, Package=0603, ComponentLink1Description="Digikey Link", ComponentLink2Description="LCSC Link", ComponentLink2URL=https://www.lcsc.com/product-detail/C105428.html?spm=wm.fly.bg.0.xh___wm.sy.dhl.mly.12-6-1&lcsc_vid=ElNWVwADR1BcUgADEwJfBlBQQ1hZBQcDEVVXV1VQE1kxVlNRQlFYX1VWRVJfUztW, Mounting Type=SMD
SW1 SW2: library part "ALPSALPINE SKRPABE010", "Tactile Switch SPST 2.5mm 4.2mm x 3.2mm Surface Mount", LCSC Part Number=C115360, Manufacturer=ALPSALPINE, Manufacturer Part Number=SKRPABE010, Package=SMD-4P,4.2x3.2mm, ComponentLink1Description="Digikey Link", ComponentLink2Description="LCSC Link", ComponentLink2URL=https://www.lcsc.com/product-detail/C115360.html?s_z=n_C115360, Mounting Type=SMD
U1 U2 U5 U6: "UDFN-6 Power Distribution Switches, Load Drivers RoHS", LCSC Part Number=C621526, Manufacturer=MICROCHIP, Package=UDFN-6, ComponentLink1Description="Digikey Link", ComponentLink2Description="LCSC Link", ComponentLink2URL=https://www.lcsc.com/product-detail/C621526.html?s_z=n_MIC2099&spm=wm.ssy.bg.0.xh&lcsc_vid=QlAIX1RQQQJfX1VRTwcNAQJXTlRaUQBVEQBYAwJfFFcxVlNRQ1RfU1ZVRFdWXzsOAxUeFF5JWBYZEEoKFBINSQcJGk4eFQsCAgIaSgADAwAHC0slRlVYUVdIHxUDCw%3D%3D, Manufacturer Part Number=MIC2099-1YMT-TR, Mounting Type=SMD
U3 U10: library part "MaxLinear SPX3819M5-L-3-3/TR", "3.3V 16V Positive Fixed SOT-23-5 Voltage Regulators - Linear, Low Drop Out (LDO) Regulators RoHS", LCSC Part Number=C9055, Manufacturer=MaxLinear, Package=SOT-23-5, ComponentLink1Description="Digikey Link", ComponentLink2Description="LCSC Link", ComponentLink2URL=https://www.lcsc.com/product-detail/C9055.html?s_z=n_spx3819M5&spm=wm.ssy.bg.1.xh&lcsc_vid=QlAIX1RQQQJfX1VRTwcNAQJXTlRaUQBVEQBYAwJfFFcxVlNRQ1VWVl1VRFdYVDsOAxUeFF5JWBYZEEoKFBINSQcJGk4eFQsCAgIaSgADAwAHC0slQFNeUlZXWQkaCgg%3D, Manufacturer Part Number=SPX3819M5-L-3-3/TR, Mounting Type=SMD
U4: library part ESP32-S3-WROOM-1U-N8, "2.4 GHz Wi-Fi (802.11 b/g/n) and Bluetooth 5 (LE) module", LCSC Part Number=C2980297, Manufacturer=ESPRESSIF, Package=SMD,19.2x18mm, ComponentLink1Description="Digikey Link", ComponentLink2Description="LCSC Link", ComponentLink2URL=https://www.lcsc.com/product-detail/C2980297.html?s_z=n_esp32%2520s3%2520wroom1u, Manufacturer Part Number=ESP32-S3-WROOM-1U-N8, Mounting Type=SMD
U7: library part "MICROCHIP USB2514B-AEZC-TR", "4 480Mbps Hub USB 2.0 VQFN-36-EP(6x6) Interface Controllers RoHS", LCSC Part Number=C16251, Manufacturer=MICROCHIP, Package=VQFN-36-EP(6x6), ComponentLink1Description="Digikey Link", ComponentLink2Description="LCSC Link", ComponentLink2URL=https://www.lcsc.com/product-detail/C16251.html?s_z=n_usb2514B, Manufacturer Part Number=USB2514B-AEZC-TR, Mounting Type=SMD
X1: library part "24MHz 4P", "Crystal 24MHz ±10ppm 9pF 30Ω SMD3225-4P", LCSC Part Number=C41383244, Manufacturer=TOGNJING, Manufacturer Part Number=XTM32024000FT00351001, Package=SMD3225-4P, ComponentLink1Description="Digikey Link", ComponentLink2Description="LCSC Link", ComponentLink2URL=https://www.lcsc.com/product-detail/C41383244.html?spm=wm.fly.bg.0.xh&lcsc_vid=QFAPUwAAQANZBgdRRwJcBAYDQlgNA1FUQgJZBgIFQAUxVlNRQ1ReXlRVR1dcVjsOAxUeFF5JWBYZEEoBGA4JCwFIFA4DSA%3D%3D, Mounting Type=SMD

## Via types
v1: diameter 0.6, hole 0.3, Top Layer to Bottom Layer, tented both sides, 259 vias
v2: diameter 0.6, hole 0.3, Top Layer to Bottom Layer, 40 vias

## Nets (pads, with @x,y where several pads share a name; then routed paths per layer and width w, separated by ;. In a path a pad name is that pad's centre, name@x,y a point inside that pad or via, vN(x,y) a via of type N, cw(c..) or ccw(c..) an arc to the next point about the centre after c; other vN are vias at no path point)
+3V3: C7.2 C23.2 C24.2 C25.2 C26.2 C27.2 C28.2 C29.2 R47.2 R48.2 R49.2 R50.2 U3.5 U7.5 U7.10 U7.15 U7.23 U7.26 U7.29 U7.36 | length 81.5
  Top Layer w0.254: v1(39.878,28.321) 39.908,28.291 40.392,28.291 U7.26@41.394,27.29 ; v1(40.005,24.765) 40.729,24.765 U7.29@41.394,25.43 ; v1(41.275,29.972) 41.29,29.957 41.29,29.545 42.454,28.381 U7.23@42.454,28.35 ; U7.36@43.869,22.955 44.236,22.588 44.236,21.677 v1(44.323,21.59) ; U7.15@46.082,28.704 47.157,29.779 47.305,29.779 v1(47.371,29.845) ; U7.5@46.435,24.369 47.917,22.888 47.978,22.888 v1(48.006,22.86) ; U7.10@47.85,26.936 48.071,27.157 48.154,27.157 v1(48.895,26.416)
  Layer 2 w0.7: v1(24.269,33.643) 25.007,33.643 27.305,35.941 30.299,35.941 v1(30.326,35.914) 30.326,33.047 37.406,25.967 37.524,25.967 v1(39.878,28.321)
  Bottom Layer w0.5: C7.2@24.257,30.861 24.28,30.884 U3.5@24.28,32.687 24.28,33.632 v1@24.257,33.655 ; v1(30.326,35.914) R49.2@31.623,35.914 ; R48.2@38.354,35.914 R47.2@40.132,35.914 R50.2@41.91,35.914 44.096,35.914 45.085,34.925 45.085,30.861 46.616,29.33 C29.2@46.616,29.258 ; v1(39.878,28.321) 40.369,27.83 C28.2@40.616,27.83 ; v1(40.005,24.765) 40.083,24.765 40.828,24.02 C24.2@41.378,24.02 ; v1(41.275,29.972) 41.886,29.361 C25.2@41.886,29.1 C28.2@40.616,27.83 ; C27.2@46.966,23.766 44.837,21.637 44.37,21.637 v1(44.323,21.59) 41.893,24.02 C24.2@41.378,24.02 ; C27.2@47.1,23.766 v1(48.006,22.86) ; C27.2@47.134,23.766 49.149,25.781 49.149,26.676 48.644,27.181 48.895,26.93 v1(48.895,26.416) ; v1(47.371,29.845) 47.344,29.845 46.835,29.336 46.693,29.336 C29.2@46.616,29.258 ; C26.2@48.394,27.48 C29.2@46.616,29.258 ; C28.2@40.616,27.83 39.878,27.092 39.878,25.52 C24.2@41.378,24.02
"+3V3 ESP1": C4.2 C37.2 J2.1 J7.1 J8.1 J9.1 R3.2 R9.2 U4.2 U10.5 | length 112
  Top Layer w0.5: v1(43.434,44.323) 43.434,43.434 43.561,43.307 52.727,43.307 ; v1(52.641,44.259) 52.641,43.392 52.727,43.307 ; R3.2@59.182,28.421 59.336,28.575 U4.2@64.415,28.575 ; v1(61.493,44.221) 61.493,43.459 61.341,43.307 52.727,43.307 ; R9.2@84.201,10.695 84.228,10.668 v1(84.963,10.668) 87.63,10.668 89.789,12.827 89.789,19.812 v1(88.823,20.778)
  Layer 2 w0.7: v1(61.493,44.221) 62.242,43.471 62.242,29.325 v1(62.992,28.575)
  Bottom Layer w0.5: v1(43.434,44.323) 44.012,44.323 J7.1@44.033,44.302 ; v1(52.641,44.259) J8.1@53.162,44.259 ; v1(61.493,44.221) J9.1@62.091,44.221 ; C37.2@61.595,21.997 61.849,21.997 62.037,22.185 U10.5@63.3,22.185 ; v1(62.992,28.575) 62.992,24.003 61.714,22.725 61.714,21.963 61.468,21.717 59.393,21.717 59.309,21.633 59.309,14.732 67.945,6.096 83.312,6.096 84.963,7.747 v1(84.963,10.668) ; J2.1@87.017,20.778 v1(88.823,20.778)
"+5V FILT PORT1": D5.5 FB3.2 J4.1 | length 19.7
  Top Layer w0.254: J4.1@11.634,21.454 J4.1@11.643,21.463
  Top Layer w0.3: v1(14.097,10.414) 16.256,10.414 16.63,10.788 16.63,11.408 D5.5@16.764,11.542
  Top Layer w0.5: J4.1@11.643,21.463 11.648,21.458 14.092,21.458 v1(14.097,21.463)
  Bottom Layer w0.5: v1(14.097,10.414) v1(14.097,21.463) ; v1@14.116,21.482 15.263,21.482 15.556,21.775 15.556,22.734 FB3.2@15.682,22.86
"+5V FILT PORT2": C43.1 D4.5 FB4.2 J5.A4_B9 J5.B4_A9 R41.2 R42.2 | length 32.2
  Top Layer w0.5: J5.A4_B9@47.128,7.557 47.128,10.552 47.625,11.049 48.895,11.049 49.403,10.541 D4.5@49.403,9.794 ; J5.B4_A9@51.928,7.557 51.943,7.572 v1(51.943,8.636)
  Layer 2 w0.7: v1(47.117,8.763) 51.816,8.763 v1(51.943,8.636)
  Bottom Layer w0.3: 51.562,6.373 52.149,5.787 ; 52.16,5.787 52.524,5.423 R41.2@52.524,4.699
  Bottom Layer w0.4: 51.562,6.373 51.562,8.343 51.855,8.636 54.73,8.636 55.787,7.579
  Bottom Layer w0.5: R42.2@46.79,4.699 46.8,4.699 47.06,4.959 47.06,5.404 47.498,5.842 47.498,8.382 v1(47.117,8.763) ; 55.787,7.579 C43.1@58.928,7.579 58.928,10.861 FB4.2@58.867,10.922
"+5V FILT PORT4": C32.1 D2.5 FB2.2 J6.1 | length 19.6
  Bottom Layer w0.5: FB2.2@71.567,40.894 73.406,40.894 ; C32.1@73.732,41.018 74.211,41.497 C32.1@74.211,41.699 ; C32.1@74.211,42.137 C32.1@74.211,41.699 ; D2.5@74.661,35.179 74.649,35.167 73.926,35.167 73.406,35.687 73.406,40.894 ; J6.1@80.772,38.663 80.772,39.497 79.811,40.458 74.689,40.458 74.211,40.937 C32.1@74.211,41.373 ; 73.406,40.894 73.732,40.894 C32.1@74.211,41.373 ; C32.1@74.211,41.373 C32.1@74.211,41.699
"+5V HOST": C15.2 D1.5 FB1.1 Q1.1 Q1.2 Q1.3 Q2.1 Q2.2 Q2.3 R1.2 R15.2 R29.2 | length 93.4
  Top Layer w0.5: v1(19.558,44.196) D1.5@21.224,44.196
  Bottom Layer w0.5: R1.2@14.378,29.718 14.378,32.285 14.859,32.766 Q1.3@16.318,32.766 Q1.2@16.318,34.036 16.318,34.792 Q1.1@16.318,35.306 16.318,38.797 17.78,40.259 19.431,40.259 ; v1(19.558,44.196) 19.558,43.688 ; R15.2@20.474,40.132 20.347,40.259 19.431,40.259 ; C15.2@24.13,44.069 23.749,43.688 Q2.3@21.017,43.688 ; R29.2@72.05,27.685 72.009,27.726 72.009,30.226 71.12,30.226 64.897,36.449 64.897,37.338 60.078,42.157 43.441,42.157 39.243,46.355 39.243,48.43 39.159,48.514 25.146,48.514 24.13,47.498 FB1.1@24.13,45.974 23.876,46.228 Q2.1@21.017,46.228 Q2.2@21.017,44.958 Q2.3@21.017,43.688 ; 19.431,40.259 19.558,40.386 19.558,43.688 ; 19.558,43.688 Q2.3@21.017,43.688
"+5V HOST FILT": C1.2 C2.2 C6.2 C11.2 C12.2 C16.2 FB1.2 R2.2 R4.2 R5.2 R10.2 R11.2 R25.2 U1.6 U2.6 U3.1 U5.6 U6.6 | length 152.1
  Top Layer w0.254: R5.2@55.599,35.941 R5.2@55.753,36.095
  Top Layer w0.5: v1(19.05,14.986) 19.939,14.986 20.215,15.262 20.215,20.298 v1(19.812,20.701) ; v1(30.48,40.259) 33.401,37.338 R25.2@33.401,35.914 ; v1(34.163,40.259) 55.753,40.259 ; R5.2@55.753,36.095 v1(55.753,37.719) 55.753,40.259 ; v1(59.944,40.259) 55.753,40.259
  Layer 2 w0.7: v1(19.05,14.986) 19.05,12.856 19.46,12.446 v1(46.609,12.446) 46.609,15.748 49.403,18.542 52.07,18.542 v1(52.197,18.415) ; v1(21.844,35.687) v1(24.892,38.735) ; v1(30.48,40.259) v1(34.163,40.259)
  Bottom Layer w0.254: v1(19.05,14.986) R2.2@19.966,14.986 ; C1.2@19.812,19.177 19.928,19.061 U1.6@19.928,17.526 ; U6.6@36.759,44.571 C12.2@36.759,46.045 ; U2.6@52.054,15.632 52.054,15.785 52.197,15.928 C2.2@52.197,17.526 ; U5.6@59.08,37.349 59.08,38.222 C11.2@59.944,39.086
  Bottom Layer w0.5: C1.2@19.812,19.177 v1(19.812,20.701) 19.812,33.655 v1(21.844,35.687) ; U3.1@24.28,34.977 24.28,37.524 C6.2@24.257,37.547 24.325,37.615 24.325,38.168 v1(24.892,38.735) 28.067,41.91 28.067,44.677 ; FB1.2@26.04,45.974 26.04,44.1 C16.2@26.035,44.095 26.065,44.095 26.454,44.484 26.454,44.514 26.617,44.677 28.067,44.677 ; v1(30.48,40.259) 30.48,44.677 ; v1(34.163,40.259) R11.2@34.163,41.302 ; C12.2@36.759,46.045 C12.2@36.703,46.101 36.703,47.287 36.619,47.371 33.174,47.371 30.48,44.677 ; v1(46.609,12.446) 46.623,12.46 47.865,12.46 R4.2@47.879,12.473 ; C2.2@52.197,17.526 v1(52.197,18.415) ; v1(55.753,37.719) 56.488,37.719 R10.2@56.515,37.692 ; C11.2@59.944,39.086 v1(59.944,40.259) ; 28.067,44.677 30.48,44.677
"+5V HOST IN": J3.1 Q2.5 Q2.6 Q2.7 Q2.8 | length 10.3
  Top Layer w0.5: v1(19.05,49.657) J3.1@19.05,51.07
  Bottom Layer w0.5: Q2.5@16.067,42.418 Q2.6@16.067,43.688 Q2.7@16.067,44.958 Q2.8@16.067,46.228 16.752,46.228 19.05,48.526 v1(19.05,49.657)
  other v1: 19.05,49.022
"+5V PORT1": C3.2 C31.2 FB3.1 R43.2 U1.1 | length 14
  Top Layer w0.5: v1(18.542,24.892) 18.561,24.873 19.704,24.873 v1(21.59,22.987) R43.2@22.76,22.987
  Bottom Layer w0.254: U1.1@21.463,17.526 21.577,17.526 21.59,17.539 C3.2@21.59,19.177
  Bottom Layer w0.5: FB3.1@17.592,22.86 17.399,23.053 C31.2@17.399,24.892 v1@18.669,24.892 ; C3.2@21.59,19.177 v1(21.59,22.987)
"+5V PORT2": C5.2 C44.2 FB4.1 R44.2 U2.1 | length 19.5
  Top Layer w0.5: R44.2@59.817,5.942 v1(60.806,5.942)
  Bottom Layer w0.254: U2.1@52.054,14.097 C5.2@53.456,14.097
  Bottom Layer w0.5: C5.2@53.456,14.097 C5.2@53.594,14.235 54.98,14.235 55.245,13.97 C44.2@55.245,11.176 56.703,11.176 FB4.1@56.957,10.922 56.957,11.872 57.15,12.065 59.944,12.065 60.806,11.203 v1(60.806,5.942)